# Altium PCB SmartHome_Switch.PcbDoc
Units mm, origin at the board's own origin, x right, y up, seen from the top; angles counter-clockwise.
Board outline 38.8 x 40 mm, 4 copper layers (Top Layer, GND, Power, Bottom Layer), stack 1.573 mm thick; 74 components, 54 nets, 260 pads, 131 vias.
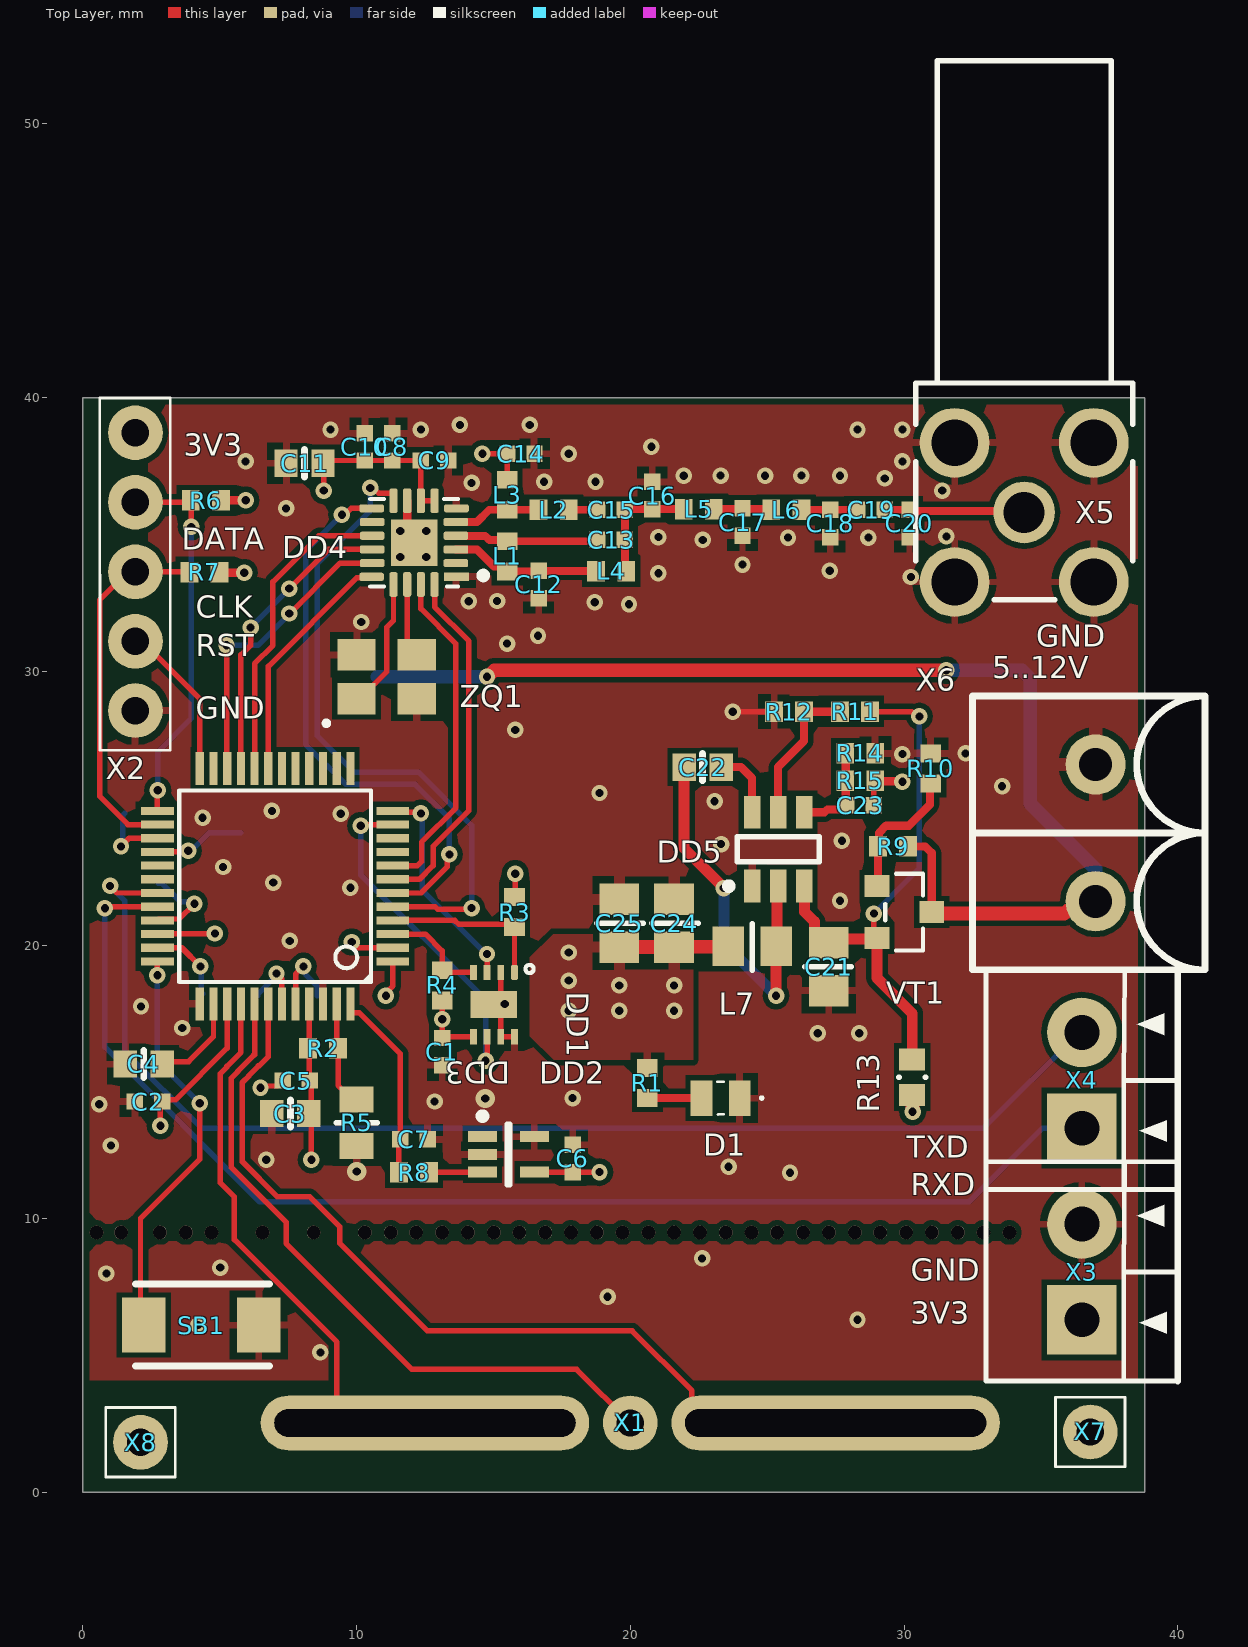
[diagram p0: Top Layer view]
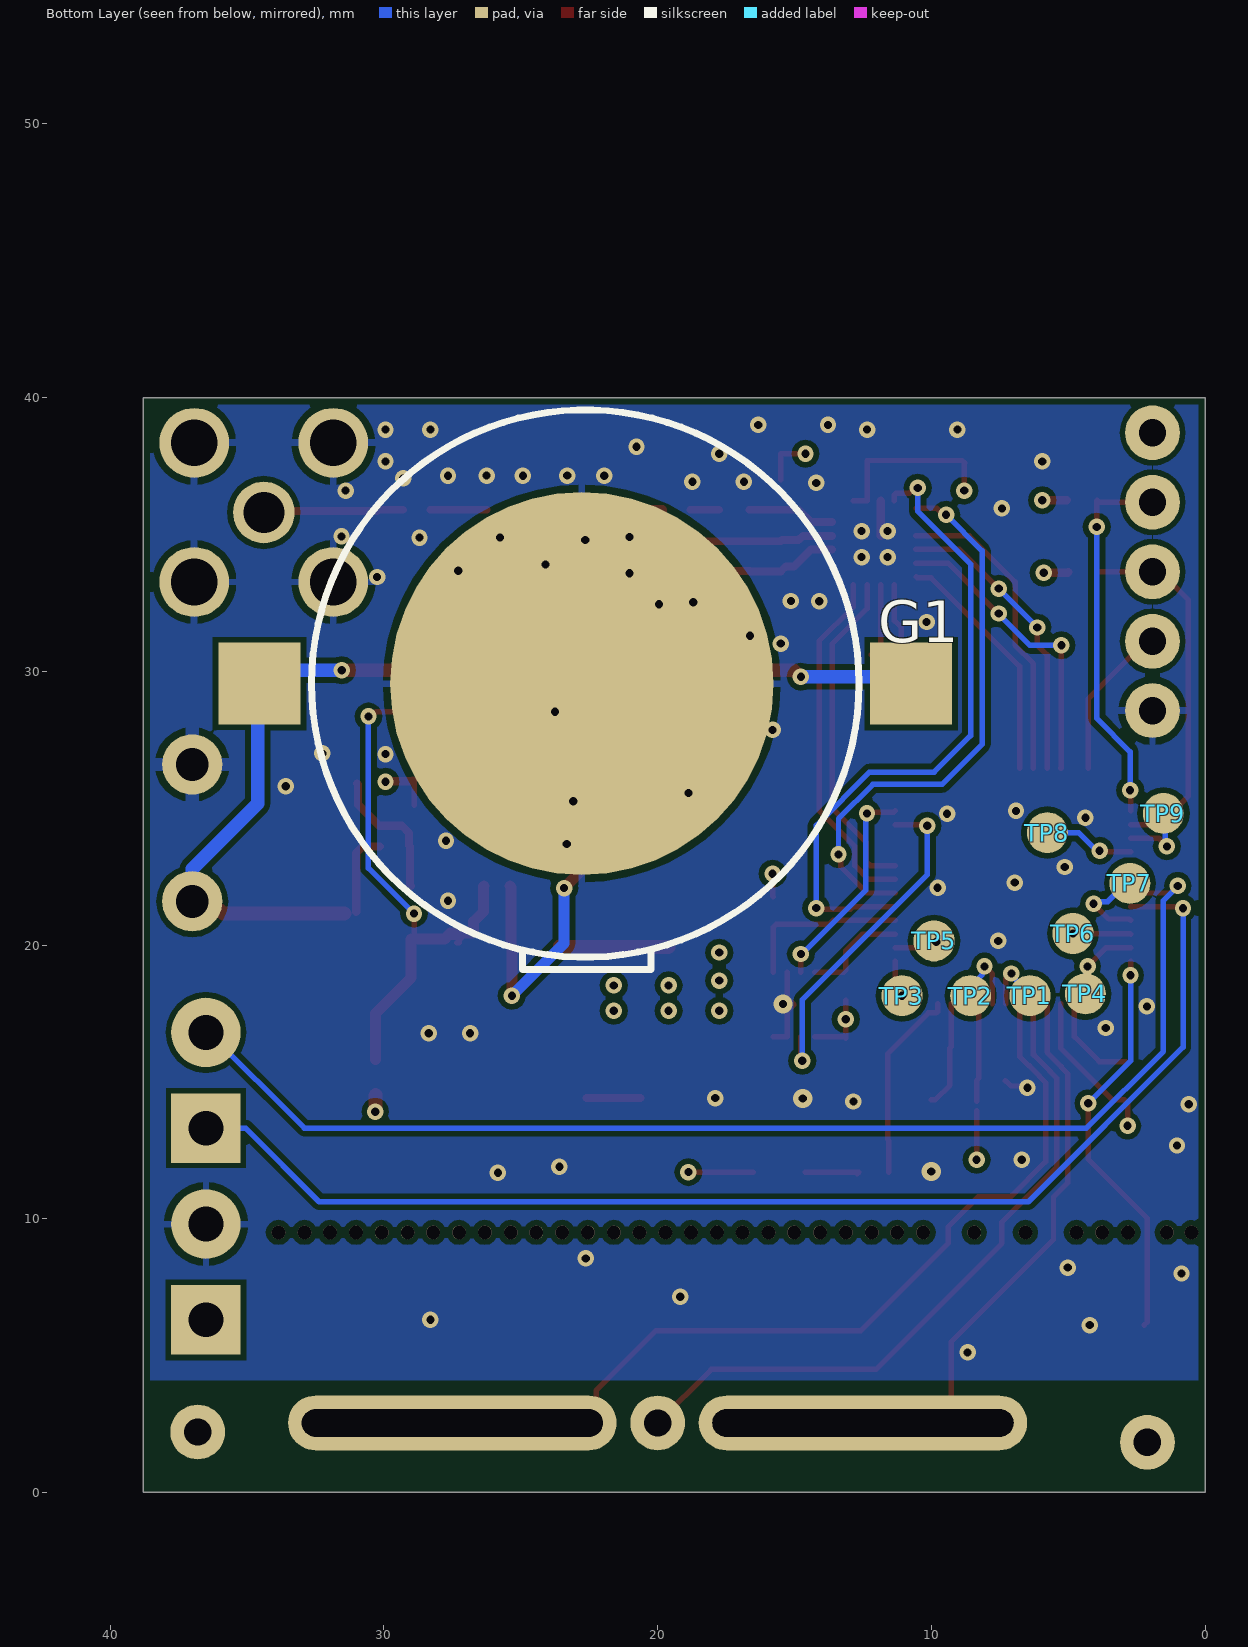
[diagram p1: Bottom Layer view, seen from below]
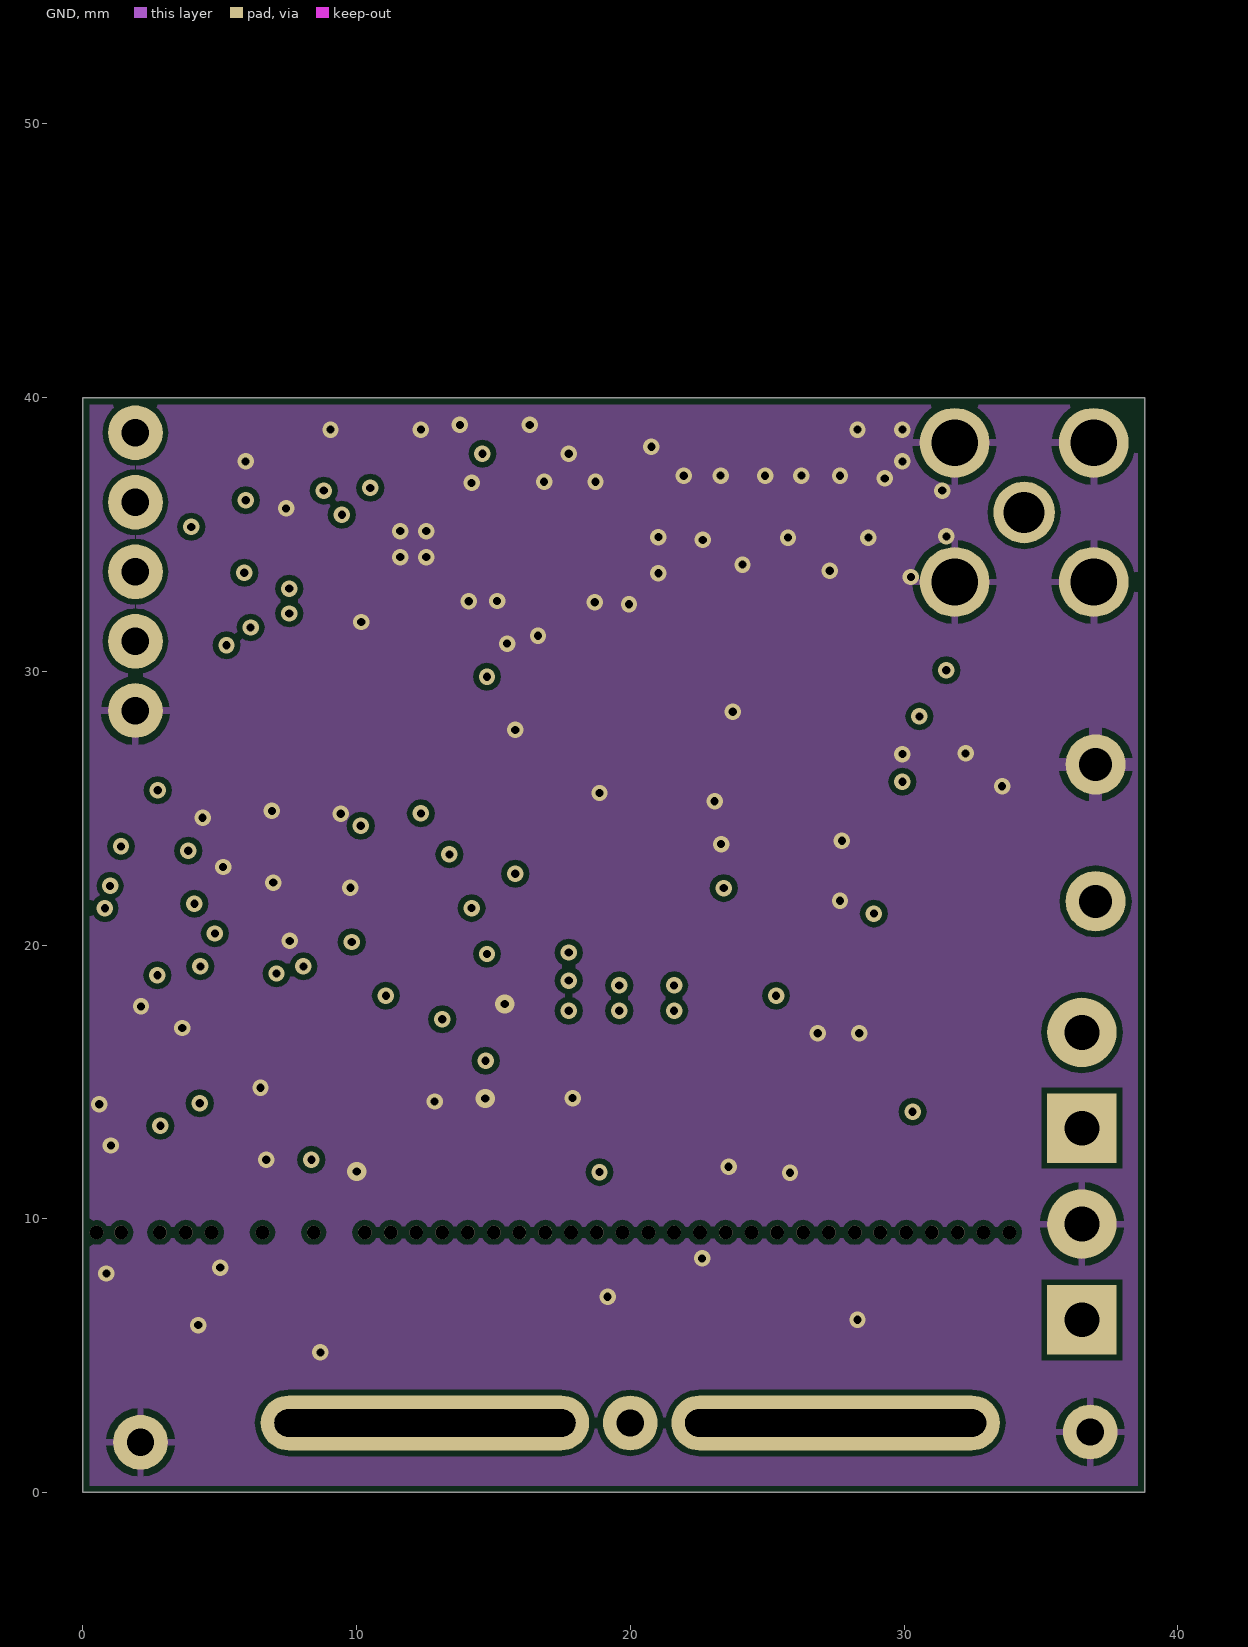
[diagram p2: GND]
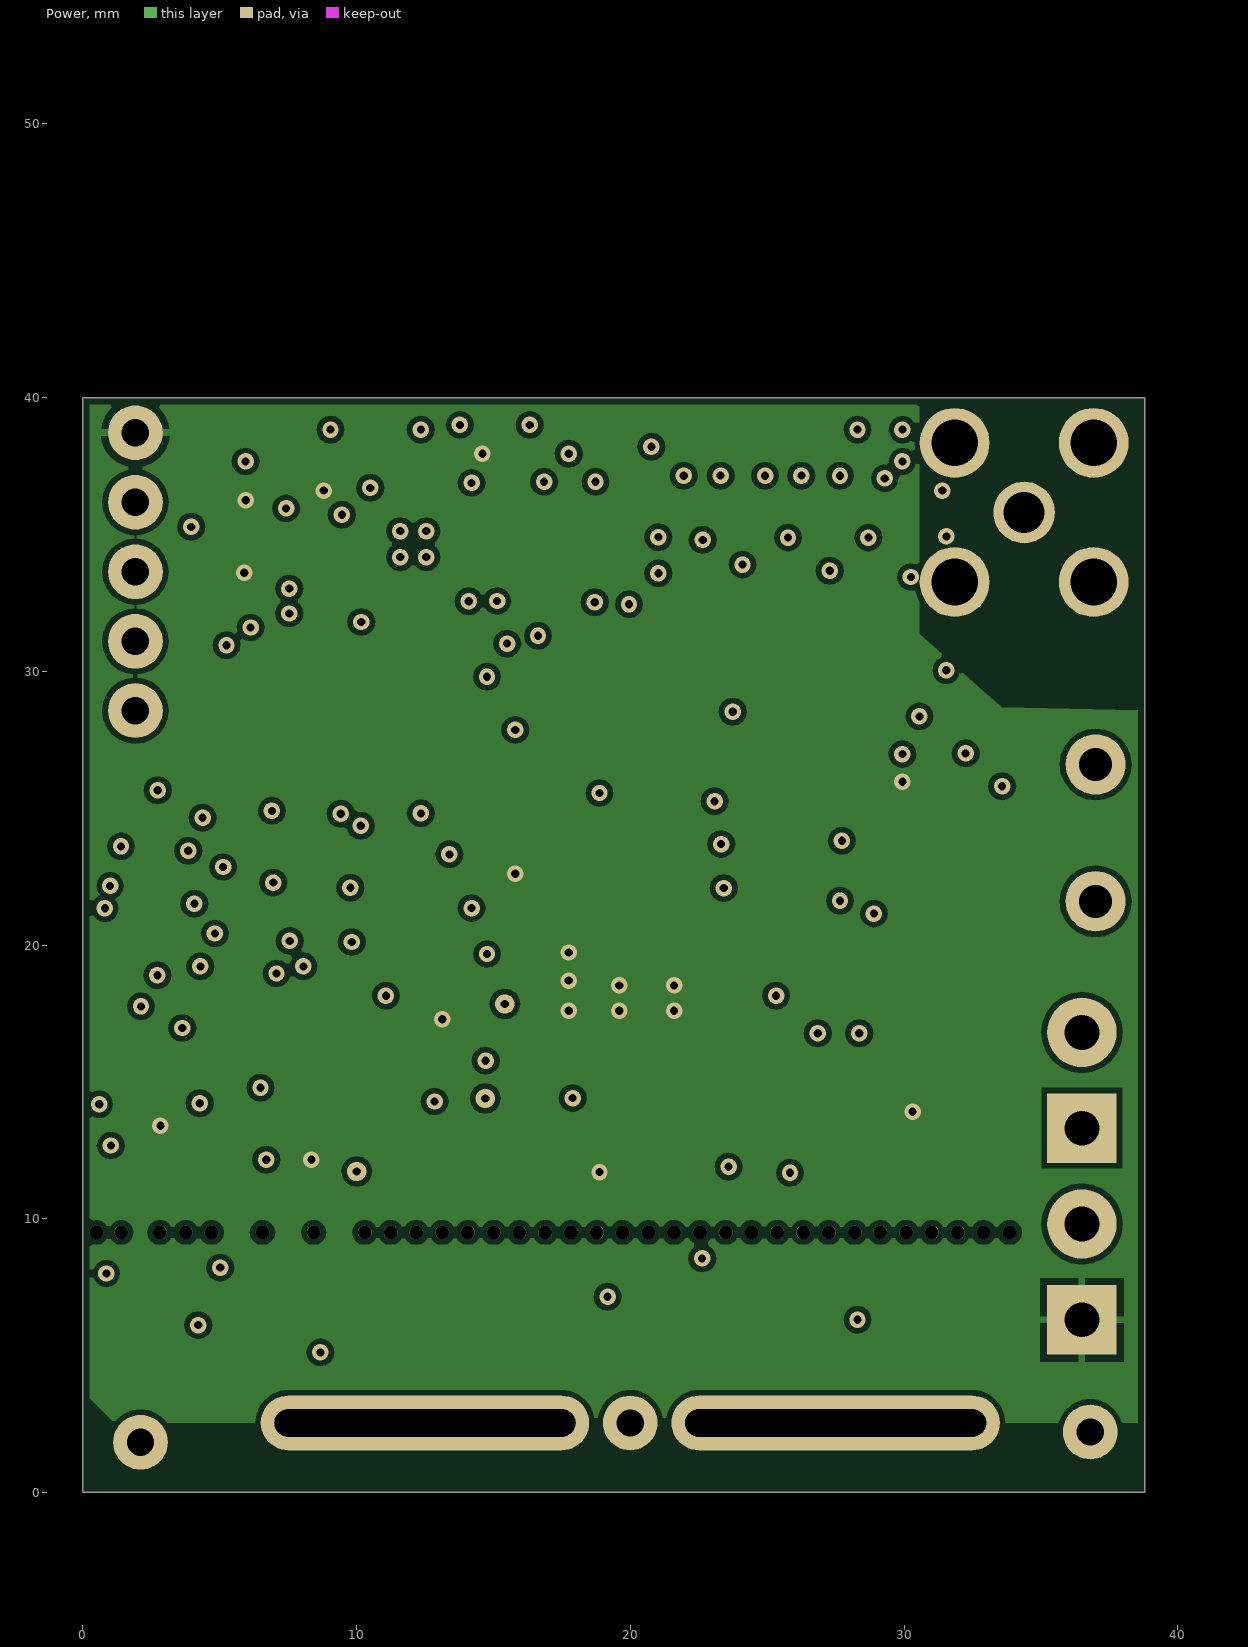
[diagram p3: Power]
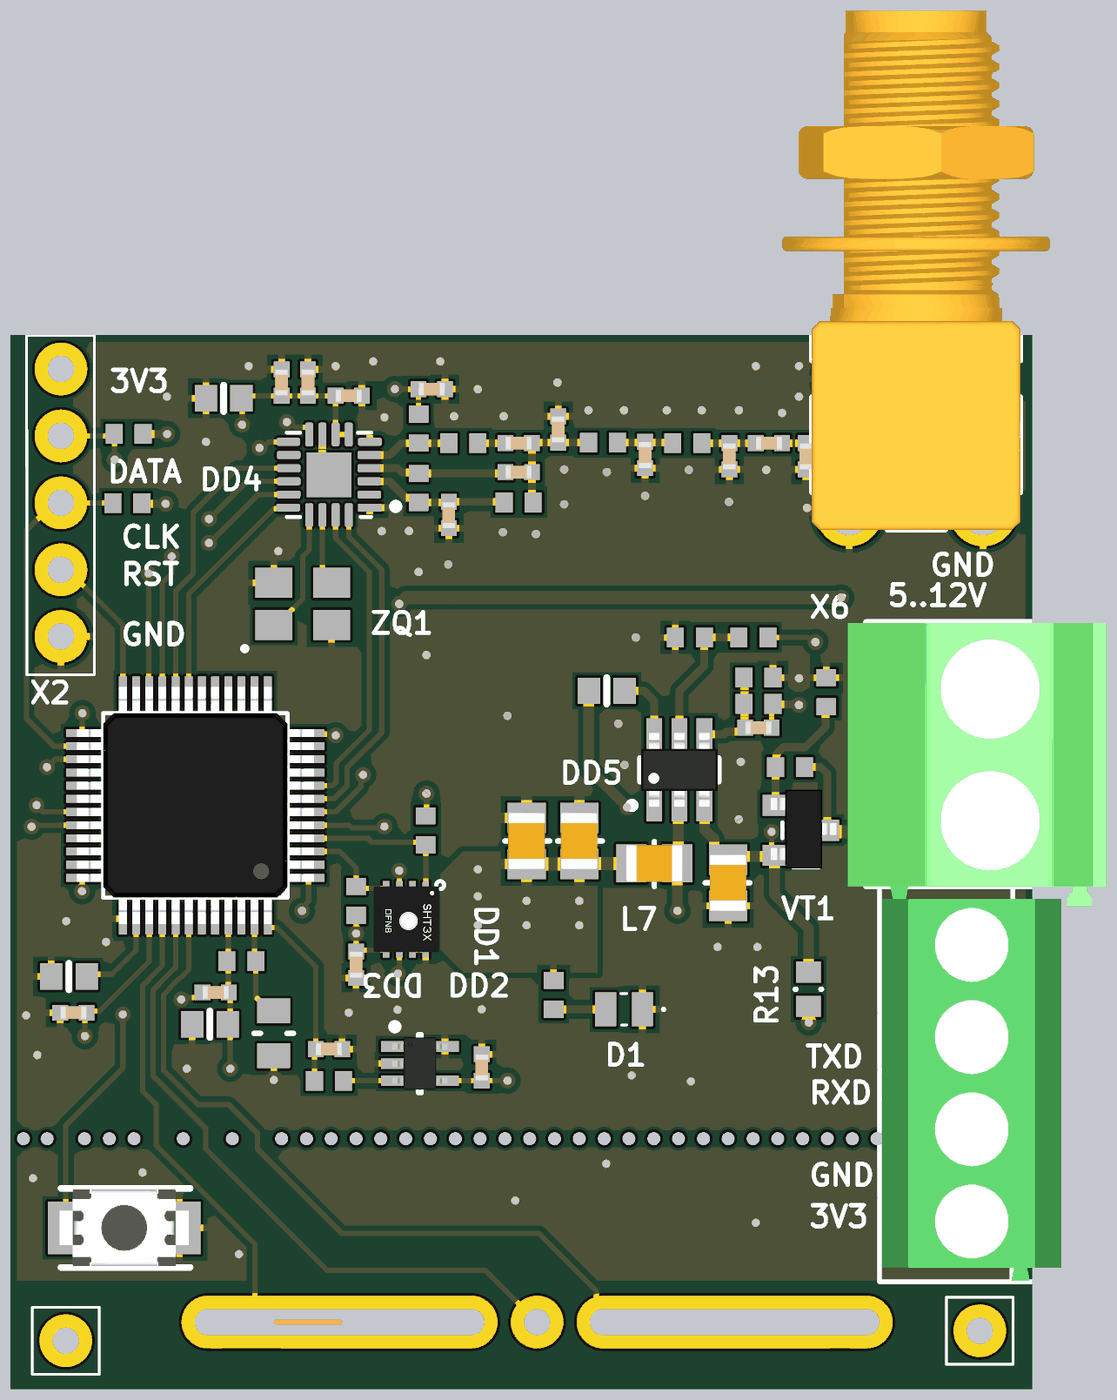
[diagram p4: 3D render of the assembled board from above, using the file's embedded part models]

## Layer stack, top to bottom
Top Solder: solder mask 0.01, Solder Resist, Dk 3.8
Top Layer: signal copper 0.036
Dielectric 2: prepreg 0.2, PP-006, Dk 4.6
GND: signal copper 0.018
Dielectric 1: dielectric 1.065, FR-4, Dk 4.6
Power: signal copper 0.018
Dielectric 3: prepreg 0.2, PP-006, Dk 4.6
Bottom Layer: signal copper 0.036
Bottom Solder: solder mask 0.01, Solder Resist, Dk 3.8

## Board outline
0,0 0,40 38.8,40 38.8,0

## Design rules (kind name [scope] priority, off if disabled: settings)
BoardOutlineClearance BoardOutlineClearance_Relay [InComponent('X6') or InComponent('X4') or InComponent('X3') or InComponent('X5') or InComponent('X2') and OnTopSilkscreen] p1: gap=0 ignorepadtopadclearanceinfootprint=FALSE
BoardOutlineClearance [All] p2: gap=0.25 ignorepadtopadclearanceinfootprint=FALSE
Clearance [All] p1: gap=0.2 ignorepadtopadclearanceinfootprint=FALSE
ComponentClearance [InComponent('X5') or InComponent('x4')] p1: gap=0 collisioncheckmode=3 verticalgap=0 showdistances=FALSE
ComponentClearance ComponentClearance_1 [All] p2: gap=0.254 collisioncheckmode=3 verticalgap=0.254 showdistances=FALSE
HoleSize [All] p1: absolutevalues=TRUE maxlimit=20 minlimit=0.025 maxpercent=80.000 minpercent=20.000
MinimumAnnularRing MinimumAnnularRing_Via [All] p1: minimumring=0.15
MinimumAnnularRing [All] p2: minimumring=0.2
MinimumSolderMaskSliver [All] p1: minsoldermaskwidth=0
PolygonConnect "Schematic Polygon Connect Style_2" [InComponent('X6')] p1: connectstyle=Relief reliefconductorwidth=0.5 reliefentries=4 polygonreliefangle="90 Angle" airgapwidth=0.254
PolygonConnect "Schematic Polygon Connect Style_1" [InComponent('C25')] p2: connectstyle=Relief reliefconductorwidth=0.4 reliefentries=4 polygonreliefangle="90 Angle" airgapwidth=0.254
PolygonConnect "Schematic Polygon Connect Style" [InComponent('C24')] p3: connectstyle=Relief reliefconductorwidth=0.4 reliefentries=4 polygonreliefangle="90 Angle" airgapwidth=0.254
PolygonConnect PolygonConnect_1 [All vs IsVia] p4: connectstyle=Direct reliefconductorwidth=0.254 reliefentries=4 polygonreliefangle="90 Angle" airgapwidth=0.254
PolygonConnect [All] p5: connectstyle=Relief reliefconductorwidth=0.254 reliefentries=4 polygonreliefangle="90 Angle" airgapwidth=0.254
RoutingVias [All] p1: holewidth=0.3 width=0.6 viastyle="Through Hole" minholewidth=0.3 minwidth=0.6 maxholewidth=5 maxwidth=5
SilkToSilkClearance [All] p1: silktosilkclearance=0.1
SilkToSolderMaskClearance [IsPad] p1: minsilkscreentomaskgap=0 clearancetoexposedcopper=TRUE
SolderMaskExpansion Via [IsVia] p1: expansion=0.102 istentingtop=TRUE
SolderMaskExpansion [All] p2: expansion=0.102 istentingtop=FALSE
Width "Schematic Width Constraint_3" [InNet('NetC17_1')] p1: maxlimit=0.291 minlimit=0.254 preferedwidth=0.29 toplayer_minwidth=0.29 toplayer_prefwidth=0.287 bottomlayer_minwidth=0.29 bottomlayer_prefwidth=0.287 impedanceprofiledriven=TRUE impedanceprofileid={CF949584-31D1-4325-900B-A550716C8CF3} impedanceprofilevalue=50.000000 minimp=50.000000 maximp=50.000000 favimp=50.000000
Width "Schematic Width Constraint_2" [InNet('NetC19_2')] p2: maxlimit=0.291 minlimit=0.254 preferedwidth=0.29 toplayer_minwidth=0.29 toplayer_prefwidth=0.287 bottomlayer_minwidth=0.29 bottomlayer_prefwidth=0.287 impedanceprofiledriven=TRUE impedanceprofileid={CF949584-31D1-4325-900B-A550716C8CF3} impedanceprofilevalue=50.000000 minimp=50.000000 maximp=50.000000 favimp=50.000000
Width "Schematic Width Constraint_1" [InNet('NetC18_1')] p3: maxlimit=0.291 minlimit=0.254 preferedwidth=0.29 toplayer_minwidth=0.29 toplayer_prefwidth=0.287 bottomlayer_minwidth=0.29 bottomlayer_prefwidth=0.287 impedanceprofiledriven=TRUE impedanceprofileid={CF949584-31D1-4325-900B-A550716C8CF3} impedanceprofilevalue=50.000000 minimp=50.000000 maximp=50.000000 favimp=50.000000
Width "Schematic Width Constraint" [InNet('NetC13_1')] p4: maxlimit=0.291 minlimit=0.254 preferedwidth=0.29 toplayer_minwidth=0.29 toplayer_prefwidth=0.287 bottomlayer_minwidth=0.29 bottomlayer_prefwidth=0.287 impedanceprofiledriven=TRUE impedanceprofileid={CF949584-31D1-4325-900B-A550716C8CF3} impedanceprofilevalue=50.000000 minimp=50.000000 maximp=50.000000 favimp=50.000000
Width [All] p5: maxlimit=2 minlimit=0.2 preferedwidth=0.2
25 further rules are at their usual default settings.

## Classes and differential pairs
net class X8_Nets: GND
net class X7_Nets: GND
component class Test_Point: X7 X8
net class TP9_Nets: NetDD2_27
net class TP8_Nets: NetDD2_28
net class TP7_Nets: NetDD2_33
net class TP6_Nets: NetDD2_34
net class TP5_Nets: NetDD2_2
net class TP4_Nets: NetDD2_35
net class TP3_Nets: NetDD2_1
component class Touch: TP1 TP2 TP3 TP4 TP5 TP6 TP7 TP8 TP9
net class ZQ1_Nets: GND NetDD4_17 NetDD4_18
net class X6_Nets: +12V_ext GND
net class X5_Nets: GND NetC19_2 NetX5_2 NetX5_3 NetX5_4 NetX5_5
net class X4_Nets: UART_RXD_5 UART_TXD_5
net class X3_Nets: 3V3 GND
net class X2_Nets: 3V3 GND NetDD2_24 NetDD2_25 NetDD2_26
net class X1_Nets: Switch_btn_1_5 Switch_btn_2_5 Switch_btn_3_5
net class VT1_Nets: +12V +12V_ext NetR9_2
net class SB1_Nets: BTN_1_5 GND
net class R15_Nets: 3V3 NetC23_2
net class R14_Nets: GND NetC23_2
net class R13_Nets: 3V3 +12V
net class R12_Nets: GND NetDD5_5
net class R11_Nets: +12V NetDD5_5
net class R10_Nets: GND NetR9_2
net class R9_Nets: +12V_ext NetR9_2
net class R8_Nets: ADC_Temp_5 NetDD3_3
net class R7_Nets: 3V3 NetDD2_26
net class R6_Nets: 3V3 NetDD2_25
net class R5_Nets: ADC_Thermistor_5 GND
net class R4_Nets: 3V3 SCL_5
net class R3_Nets: 3V3 SDA_5
net class R2_Nets: 3V3 ADC_Thermistor_5
net class R1_Nets: 3V3 NetD1_2
net class TP2_Nets: NetDD2_44
net class TP1_Nets: NetDD2_43
net class L7_Nets: 3V3 NetC22_1
net class L6_Nets: NetC17_1 NetC18_1
net class L5_Nets: NetC13_1 NetC17_1
net class L4_Nets: NetC12_1 NetC13_1
net class L3_Nets: 3V3 NetDD4_5
net class L2_Nets: NetC15_2 NetDD4_5
net class L1_Nets: NetC12_1 NetC13_2
net class G1_Nets: +12V_ext GND
net class DD5_Nets: +12V GND NetC22_1 NetC22_2 NetC23_2 NetDD5_5
net class DD4_Nets: 3V3 GND GPIO_0 GPIO_1 NetC12_1 NetC13_2 NetDD4_2 NetDD4_5 NetDD4_12 NetDD4_17 NetDD4_18 RF_CLK RF_RXTX SPI_CS SPI_MISO SPI_MOSI SPI_SCK
net class DD3_Nets: 3V3 GND NetDD3_3
net class DD2_Nets: 3V3 ADC_Temp_5 ADC_Thermistor_5 ALERT_SHT_5 BTN_1_5 GND GPIO_0 GPIO_1 NetC4_2 NetDD2_1 NetDD2_2 NetDD2_9 NetDD2_10 NetDD2_13 NetDD2_14 NetDD2_15 NetDD2_16 NetDD2_17 NetDD2_18 NetDD2_23 NetDD2_24 NetDD2_25 NetDD2_26 NetDD2_27 NetDD2_28 NetDD2_29 NetDD2_30 NetDD2_33 NetDD2_34 NetDD2_35 NetDD2_43 NetDD2_44 nRES_SHT_5 RF_CLK RF_RXTX SCL_5 SDA_5 SPI_CS SPI_MISO SPI_MOSI SPI_SCK Switch_btn_1_5 Switch_btn_2_5 Switch_btn_3_5 UART_RXD_5 UART_TXD_5
net class DD1_Nets: 3V3 ALERT_SHT_5 GND nRES_SHT_5 SCL_5 SDA_5
net class D1_Nets: GND NetD1_2
net class C25_Nets: 3V3 GND
net class C24_Nets: 3V3 GND
net class C23_Nets: 3V3 NetC23_2
net class C22_Nets: NetC22_1 NetC22_2
net class C21_Nets: +12V GND
net class C20_Nets: GND NetC19_2
net class C19_Nets: NetC18_1 NetC19_2
net class C18_Nets: GND NetC18_1
net class C17_Nets: GND NetC17_1
net class C16_Nets: GND NetC13_1
net class C15_Nets: NetC13_1 NetC15_2
net class C14_Nets: 3V3 GND
net class C13_Nets: NetC13_1 NetC13_2
net class C12_Nets: GND NetC12_1
net class C11_Nets: 3V3 GND
net class C10_Nets: 3V3 GND
net class C9_Nets: 3V3 GND
net class C8_Nets: 3V3 GND
net class C7_Nets: ADC_Temp_5 GND
net class C6_Nets: 3V3 GND
net class C5_Nets: 3V3 GND
net class C4_Nets: GND NetC4_2
net class C3_Nets: 3V3 GND
net class C2_Nets: 3V3 GND
net class C1_Nets: 3V3 GND
component class XTAL: ZQ1
component class Thermistor: R5
component class "Temperature sensor": DD3
component class SMA: X5
component class Sensor: DD1
component class RF: DD4
component class Resistor: R1 R2 R3 R4 R6 R7 R8 R9 R10 R11 R12 R13 R14 R15
component class MosFET: VT1
component class MCU: DD2
component class LED: D1
component class Inductor: L1 L2 L3 L4 L5 L6 L7
component class Connector: X1 X2 X3 X4 X6
component class Capacitor: C1 C2 C3 C4 C5 C6 C7 C8 C9 C10 C11 C12 C13 C14 C15 C16 C17 C18 C19 C20 C21 C22 C23 C24 C25
component class Button: SB1
component class Buck: DD5
component class Battery: G1
component class RS1: C1 C2 C3 C4 C5 C6 C7 D1 DD1 DD2 DD3 R1 R2 R3 R4 R5 R6 R7 R8 SB1 TP1 TP2 TP3 TP4 TP5 TP6 TP7 TP8 TP9 X1 X2 X3 X4 X7 X8
component class RF1: C8 C9 C10 C11 C12 C13 C14 C15 C16 C17 C18 C19 C20 DD4 L1 L2 L3 L4 L5 L6 X5 ZQ1
component class PWR1: C21 C22 C23 C24 C25 DD5 G1 L7 R9 R10 R11 R12 R13 R14 R15 VT1 X6

## Components (designator, comment, footprint, x,y, rotation, side; value= is the part's Value field where it differs from the comment)
C1 "100nF" CAP0402 13.13,16.102 r90 top
C2 "100nF" CAP0402 2.399,14.282 r0 top
C3 "10uF" CAPC0603N 7.58,13.844 r180 top
C4 "1uF" CAPC0603N 2.226,15.654 r0 top
C5 "100nF" CAP0402 7.797,15.05 r0 top
C6 "100nF" CAP0402 17.9,12.205 r270 top
C7 "100nF" CAP0402 12.1,12.9 r180 top
C8 "100pF" CAP0402 11.3,38.2 r270 top
C9 "33pF" CAP0402 12.85,37.7 r180 top
C10 "100nF" CAP0402 10.3,38.2 r270 top
C11 "10uF" CAPC0603N 8.1,37.6 r180 top
C12 "5.1pF" CAP0402 16.65,33.17 r270 top
C13 "2.7pF" CAP0402 19.3,34.8 r180 top
C14 "270pF" CAP0402 16,37.95 r0 top
C15 "6.2pF" CAP0402 19.3,35.9 r180 top
C16 "10pF" CAP0402 20.8,36.42 r90 top
C17 "15pF" CAP0402 24.1,35.45 r270 top
C18 "8.2pF" CAP0402 27.3,35.4 r270 top
C19 "270pF" CAP0402 28.8,35.9 r0 top
C20 "4.3pF" CAP0402 30.2,35.4 r270 top
C21 "CAPC0805" CAPC0805N 27.251,19.212 r90 top value=22uF
C22 "1uF" CAPC0603N 22.644,26.5 r0 top
C23 "33pF" CAP0402 28.4,25.1 r180 top
C24 "CAPC0805" CAPC0805N 21.6,20.8 r270 top value=22uF
C25 "CAPC0805" CAPC0805N 19.6,20.8 r270 top value=22uF
D1 "Color" LED603 23.3,14.409 r180 top
DD1 "SHT30-DIS-B2.5KS" DFN8 15.021,17.825 r270 top
DD2 "Value" LQFP48 7.025,22.15 r180 top locked
DD3 "Value" SC70-5 15.55,12.35 r0 top
DD4 "Si4455-С2A-GM" SLAB-QFN-20 12.1,34.7 r180 top
DD5 "Value" SOT23-6 25.4,23.5 r90 top
G1 "C70373" BAT-SMD_CR2032-3V 22.644,29.551 r90 bottom locked
L1 "56nH" RESC0402(1005)_M 15.5,34.2 r270 top
L2 "56nH" RESC0402(1005)_M 17.2,35.9 r0 top
L3 "220nH" RESC0402(1005)_M 15.5,36.45 r90 top
L4 "56nH" RESC0402(1005)_M 19.3,33.65 r0 top
L5 "18nH" RESC0402(1005)_M 22.5,35.92 r0 top
L6 "18nH" RESC0402(1005)_M 25.7,35.9 r0 top
L7 "22uH" CAPC0805N 24.45,19.95 r180 top
R1 "1k" RESC0402(1005)_M 20.627,14.959 r270 top
R2 "10k" RESC0402(1005)_M 8.775,16.237 r0 top
R3 "10k" RESC0402(1005)_M 15.771,21.204 r90 top
R4 "10k" RESC0402(1005)_M 13.13,18.525 r270 top
R5 "10kohm" RESC0805L 10,13.5 r270 top
R6 "100k" RESC0402(1005)_M 4.495,36.247 r0 top
R7 "100k" RESC0402(1005)_M 4.445,33.623 r0 top
R8 "470" RESC0402(1005)_M 12.1,11.696 r180 top
R9 "100k" RESC0402(1005)_M 29.6,23.604 r180 top
R10 "100k" RESC0402(1005)_M 30.979,26.45 r90 top
R11 "10k" RESC0402(1005)_M 28.21,28.525 r180 top
R12 "6.8k" RESC0402(1005)_M 25.8,28.525 r180 top
R13 "DNI" RESC0603N 30.3,15.172 r270 top
R14 "33k" RESC0402(1005)_M 28.4,27 r0 top
R15 "100k" RESC0402(1005)_M 28.4,26 r0 top
SB1 "DTSM-3" SW_SKRKAEE020 6.425,6.116 r180 top
TP1 "TP-SINGLE-ROUND" TP-ROUND-TOP-1.5 6.399,18.15 r180 bottom
TP2 "TP-SINGLE-ROUND" TP-ROUND-TOP-1.5 8.564,18.15 r90 bottom
TP3 "TP-SINGLE-ROUND" TP-ROUND-TOP-1.5 11.074,18.15 r90 bottom
TP4 "TP-SINGLE-ROUND" TP-ROUND-TOP-1.5 4.375,18.217 r90 bottom
TP5 "TP-SINGLE-ROUND" TP-ROUND-TOP-1.5 9.903,20.15 r90 bottom
TP6 "TP-SINGLE-ROUND" TP-ROUND-TOP-1.5 4.826,20.422 r90 bottom
TP7 "TP-SINGLE-ROUND" TP-ROUND-TOP-1.5 2.749,22.254 r90 bottom
TP8 "TP-SINGLE-ROUND" TP-ROUND-TOP-1.5 5.766,24.105 r90 bottom
TP9 "TP-SINGLE-ROUND" TP-ROUND-TOP-1.5 1.525,24.808 r90 bottom
VT1 "AO3401A" SOT-23 30.013,21.204 r0 top
X1 "PLS-3" SmartHome_for_switch 20,2.54 r0 top
X2 "PLS5" PLS5 1.922,38.714 r270 top
X3 "DG350-3.5-02P-14-00A" Conn_3,5mm_2pin 36.5,6.307 r90 top
X4 "DG350-3.5-02P-14-00A" Conn_3,5mm_2pin 36.5,13.307 r90 top
X5 "Value" 60311042114502 34.388,35.801 r180 top
X6 "DG500-5.0-02P-14" DG500-5.0-02P-14 37,24.095 r90 top
X7 "PLS1" PLS1 36.805,2.21 r0 top
X8 "PLS1" PLS1 2.108,1.833 r0 top
ZQ1 "X322525MOB4SI" TSX-3225_V 11.1,29.8 r0 top

## Footprints (in the part's own frame and the unit in brackets; to place one, negate y for a bottom-side part, rotate by r counter-clockwise, add the part's x,y. Pads: shape width x height; smd on the part's side, far side on the other; paste and mask are expansions set on the pad)
60311042114502 [mm] "SMA PCB THT Jack Right Angle  Rear Mount Bulkhead"
  round 2.25 hole 1.5: 1(0,0)
  round 2.55 hole 1.7: 2(-2.54,2.54) 3(2.54,2.54) 4(2.54,-2.54) 5(-2.54,-2.54)
  silkscreen extent -3.96,-16.5 3.96,3.19, body extent -5.1,-16.5 5.1,3.19, height 12.2
BAT-SMD_CR2032-3V [mm]
  rect 3x3 smd: 1(0,-11.9) 1(0,11.9)
  round 14 smd: 2(0,0.127)
  silkscreen extent -10.45,-10 10,10, body extent -10.23,-12.25 9.57,11.75, height 3.91
CAP0402 [mm]
  rect 0.6x0.6 smd: 1(-0.5,0) 2(0.5,0)
  body extent -0.5,-0.25 0.5,0.25, height 0.49
CAPC0603N [mm] "Chip Capacitor, 2-Leads, Body 1,60x0,85mm, IPC Medium Density"
  rect 0.85x1 smd: 1(-0.675,0) 2(0.675,0)
  silkscreen extent 0,-0.5 0,0.5, body extent -0.85,-0.48 0.85,0.47, height 0.8
CAPC0805N [mm] "Chip Capacitor, 2-Leads, Body 2,00x1,25mm, IPC Medium Density"
  rect 1.15x1.45 smd: 1(-0.875,0) 2(0.875,0)
  silkscreen extent 0,-0.82 0,0.87, body extent -1.07,-0.7 1.07,0.7, height 0.9
Conn_3,5mm_2pin [mm]
  rect 2.54x2.54 hole 1.27: 1(0,0)
  round 2.54 hole 1.27: 2(3.5,0)
  silkscreen extent -2.24,-3.5 5.78,3.5, body extent -2.2,-3.4 5.8,3.4, height 8.4
DFN8 [mm]
  rrect50% 0.55x0.25 smd: 1(-1.175,0.75)
  rect 0.55x0.25 smd: 2(-1.175,0.25) 3(-1.175,-0.25) 4(-1.175,-0.75) 5(1.175,-0.75) 6(1.175,-0.25) 7(1.175,0.25) 8(1.175,0.75)
  rect 1x1.7 smd: 9(0,0)
  silkscreen extent -1.45,1.15 -1.15,1.45, body extent -1.25,-1.23 1.25,1.27, height 0.9
DG500-5.0-02P-14 [mm]
  round 2.2 hole 1.2: 1(-2.5,0) 2(2.5,0)
  silkscreen extent -5,-4 5,4.5, body extent -5.77,-4.6 4.97,5.2, height 13.8
LED603 [mm]
  rect 0.8x1.3 smd: 1(-0.7,0) 2(0.7,0)
  silkscreen extent -1.55,-0.6 0.12,0.6
LQFP48 [mm]
  rect 1.2x0.3 smd: 1(-4.3,2.75) 2(-4.3,2.25) 3(-4.3,1.75) 4(-4.3,1.25) 5(-4.3,0.75) 6(-4.3,0.25) 7(-4.3,-0.25) 8(-4.3,-0.75) 9(-4.3,-1.25) 10(-4.3,-1.75) 11(-4.3,-2.25) 12(-4.3,-2.75) 25(4.3,-2.75) 26(4.3,-2.25) 27(4.3,-1.75) 28(4.3,-1.25) 29(4.3,-0.75) 30(4.3,-0.25) 31(4.3,0.25) 32(4.3,0.75) 33(4.3,1.25) 34(4.3,1.75) 35(4.3,2.25) 36(4.3,2.75)
  rect 0.3x1.2 smd: 13(-2.75,-4.3) 14(-2.25,-4.3) 15(-1.75,-4.3) 16(-1.25,-4.3) 17(-0.75,-4.3) 18(-0.25,-4.3) 19(0.25,-4.3) 20(0.75,-4.3) 21(1.25,-4.3) 22(1.75,-4.3) 23(2.25,-4.3) 24(2.75,-4.3) 37(2.75,4.3) 38(2.25,4.3) 39(1.75,4.3) 40(1.25,4.3) 41(0.75,4.3) 42(0.25,4.3) 43(-0.25,4.3) 44(-0.75,4.3) 45(-1.25,4.3) 46(-1.75,4.3) 47(-2.25,4.3) 48(-2.75,4.3)
  silkscreen extent -3.5,-3.5 3.5,3.5, body extent -4.5,-4.5 4.5,4.5, height 1.5
PLS1 [mm]
  round 2 hole 1: 1(0,0)
  silkscreen extent -1.27,-1.27 1.27,1.27
PLS5 [mm]
  round 2 hole 1: 1(0,0) 2(2.54,0) 3(5.08,0) 4(7.62,0) 5(10.15,0)
  silkscreen extent -1.27,-1.3 11.6,1.27
RESC0402(1005)_M [mm] "Chip Resistor, Body 1.0x0.5mm, IPC Low Density"
  rect 0.65x0.75 smd: 1(-0.55,0) 2(0.55,0)
  body extent -0.52,-0.28 0.53,0.28, height 0.4
RESC0603N [mm] "Chip Resistor, 2-Leads, Body 1,60x0,85mm, IPC Medium Density"
  rect 0.8x0.95 smd: 1(-0.65,0) 2(0.65,0)
  silkscreen extent 0,-0.5 0,0.5, body extent -0.85,-0.48 0.85,0.48, height 0.5
RESC0805L [mm] "Chip Resistor, 2-Leads, Body 2,00x1,25mm, IPC High Density"
  rect 0.95x1.25 smd: 1(-0.85,0) 2(0.85,0)
  silkscreen extent 0,-0.75 0,0.75, body extent -1.1,-0.67 1.1,0.67, height 0.7
SC70-5 [mm] "SOT363, 6-Leads, Body 2x1.3mm, Pitch 0.65mm, Lead Span 2.1mm, IPC Low Density"
  rect 1.05x0.4 smd: 1(-0.95,0.65) 2(-0.95,0) 3(-0.95,-0.65) 4(0.95,-0.65) 5(0.95,0.65)
  silkscreen extent -1.07,-1.1 0.05,1.52, body extent -1.05,-1 1.05,1, height 0.95
SLAB-QFN-20 [mm] "QFN, 20-Leads, Body 3x3mm, Pitch 0.5mm, Thermal Pad 1.7x1.7mm"
  rect 0.9x0.3 smd: 1(-1.55,1.25)
  rrect50% 0.9x0.3 smd: 2(-1.53,0.75) 3(-1.53,0.25) 4(-1.53,-0.25) 5(-1.53,-0.75) 6(-1.55,-1.25) 11(1.55,-1.25) 12(1.53,-0.75) 13(1.53,-0.25) 14(1.53,0.25) 15(1.53,0.75) 16(1.55,1.25)
  rrect50% 0.3x0.9 smd: 7(-0.75,-1.53) 8(-0.25,-1.53) 9(0.25,-1.53) 10(0.75,-1.53) 17(0.75,1.53) 18(0.25,1.53) 19(-0.25,1.53) 20(-0.75,1.53)
  rect 1.7x1.7 smd: 21(0,0)
  silkscreen extent -2.66,-1.6 1.6,1.6, body extent -1.5,-1.5 1.5,1.5, height 0.9
SmartHome_for_switch [mm]
  oval 12x2 hole 1 slot 11 at 0 deg: 1(-7.5,0) 3(7.5,0)
  round 2 hole 1: 2(0,0)
SOT23-6 [mm] "SOT23, 6-Leads, Body 2,90x2,80mm, Pitch 0,95mm, IPC Medium Density"
  rect 1.2x0.6 smd: 1(-1.35,0.95) 2(-1.35,0) 3(-1.35,-0.95) 4(1.35,-0.95) 5(1.35,0) 6(1.35,0.95)
  silkscreen extent -1.47,-1.5 0.45,1.92, body extent -1.4,-1.45 1.4,1.45, height 1.45
SOT-23 [mm]
  rect 0.9x0.8 smd: 1(-1,0.95) 2(-1,-0.95) 3(1,0)
  silkscreen extent -0.7,-1.4 0.68,1.4, body extent -1.15,-1.45 1.35,1.55, height 1.05
SW_SKRKAEE020 [mm]
  rect 1.6x2 smd: 1(0,0) 2(4.2,0)
  silkscreen extent -0.4,-1.5 4.5,1.5, body extent -0.35,-1.45 4.55,1.45, height 2
TP-ROUND-TOP-1.5 [mm]
  round 1.5 smd: 1(0,0)
TSX-3225_V [mm] "SMD, 4-Leads, Body 3.2x2.5mm"
  rect 1.4x1.15 smd: 1(-1.1,-0.8) 2(1.1,-0.8) 3(1.1,0.8) 4(-1.1,0.8)
  silkscreen extent -2.25,-1.75 -2.15,-1.65, body extent -1.6,-1.25 1.6,1.25, height 0.6

## Part data
C1 C2 C5 C6 C7 C8 C9 C10 C12 C13 C14 C15 C16 C17 C18 C19 C20 C23: library part CAP0402, Package=C_0402, CFootprint=CAP0402, ClassName=Capacitor, ComponentLink1Description=Datasheet, MntType=SMD, MSL="MSL 1", Part Number=CAP0402, PartType="CHIP CERAMIC CAPACITOR", Pins=2, RoHS=Comply
  C1 C2 C5 C6 C7 C10: BOMDescription="SMD CHIP CERAMIC CAPACITOR C_0402 100nF"
  C8: BOMDescription="SMD CHIP CERAMIC CAPACITOR C_0402 100pF"
  C9 C23: BOMDescription="SMD CHIP CERAMIC CAPACITOR C_0402 33pF"
  C12: BOMDescription="SMD CHIP CERAMIC CAPACITOR C_0402 5.1pF"
  C13: BOMDescription="SMD CHIP CERAMIC CAPACITOR C_0402 2.7pF"
  C14 C19: BOMDescription="SMD CHIP CERAMIC CAPACITOR C_0402 270pF"
  C15: BOMDescription="SMD CHIP CERAMIC CAPACITOR C_0402 6.2pF"
  C16: BOMDescription="SMD CHIP CERAMIC CAPACITOR C_0402 10pF"
  C17: BOMDescription="SMD CHIP CERAMIC CAPACITOR C_0402 15pF"
  C18: BOMDescription="SMD CHIP CERAMIC CAPACITOR C_0402 8.2pF"
  C20: BOMDescription="SMD CHIP CERAMIC CAPACITOR C_0402 4.3pF"
C3 C4 C11 C22: library part CAPC, Package=CAPC0603N, CFootprint=CAPC0603N, ClassName=Capacitor, ComponentLink1Description=Datasheet, MntType=SMD, MSL="MSL 1", Part Number=CAPC, PartType="CHIP CERAMIC CAPACITOR", Pins=2, RoHS=Comply
  C3 C11: BOMDescription="SMD CHIP CERAMIC CAPACITOR CAPC0603N 10uF"
  C4 C22: BOMDescription="SMD CHIP CERAMIC CAPACITOR CAPC0603N 1uF"
C21 C24 C25: Package=CAPC0805N, Voltage=25V, BOMDescription="SMD CHIP CERAMIC CAPACITOR CAPC0805N 22uF  25V", CFootprint=CAPC0805N, ClassName=Capacitor, ComponentLink1Description=Datasheet, MntType=SMD, MSL="MSL 1", Part Number=CAPC0805, PartType="CHIP CERAMIC CAPACITOR", Pins=2, RoHS=Comply
  C24 C25: Rule="Polygon Connect Style [Style - Relief Connect    Width = 0.4mm    Angle = 90    # Entries = 4    Air Gap = 0.254mm    ]"
D1: library part LEDC, Package=LED603, BOMDescription="SMD CHIP LED LED603 Color", CFootprint=LED603, ClassName=LED, ComponentLink1Description=Datasheet, MntType=SMD, MSL="MSL 5", Part Number=LEDC, PartType="CHIP LED", Pins=2, RoHS=Comply
DD1: Manufacturer=SENSIRION, Package=DFN8, BOMDescription=SHT30-DIS-B2.5KS, CFootprint=DFN8, ClassName=Sensor, ComponentLink1Description=Datasheet, ComponentLink1URL=https://datasheet.lcsc.com/lcsc/2012111104_Sensirion-SHT30-DIS-B2-5KS_C77361.pdf, MntType=SMD, MPN=SHT30-DIS-B2.5KS, MSL="MSL 1", Part Number=SHT30-DIS-B2.5KS, PartType="Sensor temp and humidity", Pins=9, RoHS=Comply
DD2: library part M031LD2AE, Manufacturer=Nuvoton, Package=LQFP48, BOMDescription=M031LD2AE, CFootprint=LQFP48, ClassName=MCU, ComponentLink1Description=Datasheet, ComponentLink1URL=https://www.nuvoton.com/products/microcontrollers/arm-cortex-m0-mcus/m031-series/m031ld2ae/?group=Document&tab=2, MntType=SMD, MPN=M031LD2AE, MSL="MSL 1", Part Number=M031LD2AE, PartType=MCU, Pins=48, RoHS=Comply
DD3: library part LMT88DCKR, Manufacturer=TI, Package=SC70, BOMDescription=LMT88DCKR, CFootprint=SC70-5, ClassName="Temperature sensor", ComponentLink1Description=Datasheet, ComponentLink1URL=https://www.ti.com/lit/ds/symlink/lmt88.pdf?ts=1635229688804&ref_url=https%253A%252F%252Fwww.ti.com%252Fproduct%252FLMT88%253Fqgpn%253Dlmt88, MntType=SMD, MPN=LMT88DCKR, MSL="MSL 1", Part Number=LMT88DCKR, PartType="Temperature sensor", Pins=5, RoHS=Comply
DD4: Manufacturer=SiLabs, Package=QFN20, BOMDescription=Si4455-С2A-GM, CFootprint=SLAB-QFN-20, ClassName=RF, ComponentLink1Description=Datasheet, ComponentLink1URL=https://www.silabs.com/documents/public/data-sheets/Si4455.pdf, MntType=SMD, MPN=Si4455-С2A-GM, MSL="MSL 1", Part Number=Si4455-С2A-GM, PartType=RF, Pins=21, RoHS=Comply
DD5: library part MT1470, Manufacturer="XI'AN Aerosemi Tech", Package=SOT23-6, BOMDescription=MT1470, CFootprint=SOT23-6, ClassName=Buck, ComponentLink1Description=Datasheet, ComponentLink1URL=https://datasheet.lcsc.com/lcsc/2109171430_XI-AN-Aerosemi-Tech-MT1470_C181781.pdf, MntType=SMD, MPN=MT1470, MSL="MSL 1", Part Number=MT1470, PartType="Buck converter", Pins=6, RoHS=Comply
L1 L2 L3 L4 L5 L6: library part Inductor_SMD, Manufacturer=TDK, MPN=MLF2012, Package=RESC0402(1005)_M, CFootprint=RESC0402(1005)_M, ClassName=Inductor, ComponentLink1Description=Datasheet, MntType=SMD, MSL="MSL 1", Part Number=Inductor_SMD, PartType=INDUCTOR, Pins=2, RoHS=Comply
  L1 L2 L4: BOMDescription="SMD INDUCTOR RESC0402(1005)_M 56nH    MLF2012"
  L3: BOMDescription="SMD INDUCTOR RESC0402(1005)_M 220nH    MLF2012"
  L5 L6: BOMDescription="SMD INDUCTOR RESC0402(1005)_M 18nH    MLF2012"
L7: library part MGFL2012F220MT-LF, Manufacturer=microgate, Package=CAPC0805N, BOMDescription=MGFL2012F220MT-LF, CFootprint=CAPC0805N, ClassName=Inductor, ComponentLink1Description=Datasheet, ComponentLink1URL=https://datasheet.lcsc.com/lcsc/2002201432_microgate-MGFL2012F220MT-LF_C486334.pdf, MntType=SMD, MPN=MGFL2012F220MT-LF, MSL="MSL 1", Part Number=MGFL2012F220MT-LF, PartType=INDUCTOR, Pins=2, RoHS=Comply
R1 R2 R3 R4 R6 R7 R8 R9 R10 R11 R12 R14 R15: library part RES0402, Package=RESC0402(1005)_M, CFootprint=RESC0402(1005)_M, ClassName=Resistor, ComponentLink1Description=Datasheet, MntType=SMD, MSL="MSL 1", Part Number=RES0402, PartType="CHIP RESISTOR", Pins=2, RoHS=Comply
  R1: BOMDescription="SMD CHIP RESISTOR RESC0402(1005)_M 1k"
  R2 R3 R4 R11: BOMDescription="SMD CHIP RESISTOR RESC0402(1005)_M 10k"
  R6 R7 R9 R10 R15: BOMDescription="SMD CHIP RESISTOR RESC0402(1005)_M 100k"
  R8: BOMDescription="SMD CHIP RESISTOR RESC0402(1005)_M 470"
  R12: BOMDescription="SMD CHIP RESISTOR RESC0402(1005)_M 6.8k"
  R14: BOMDescription="SMD CHIP RESISTOR RESC0402(1005)_M 33k"
R5: library part SDNT2012X103F3950FTF, Manufacturer=Sunlord, Package=RESC0805L, BOMDescription=SDNT2012X103F3950FTF, CFootprint=RESC0805L, ClassName=Thermistor, ComponentLink1Description=Datasheet, ComponentLink1URL=https://datasheet.lcsc.com/lcsc/1811111111_Sunlord-SDNT2012X103F3950FTF_C95968.pdf, MntType=SMD, MPN=SDNT2012X103F3950FTF, MSL="MSL 1", Part Number=SDNT2012X103F3950FTF, PartType=Thermistor, Pins=2, RoHS=Comply
R13: library part RES, Package=RESC0603N, BOMDescription="SMD CHIP RESISTOR RESC0603N DNI", CFootprint=RESC0603N, ClassName=Resistor, ComponentLink1Description=Datasheet, MntType=SMD, MSL="MSL 1", Part Number=RES, PartType="CHIP RESISTOR", Pins=2, RoHS=Comply
SB1: library part SKRKAEE020, BOMDescription=SKRKAEE020, CFootprint=SW_SKRKAEE020, ClassName=Button, ComponentLink1Description=Datasheet, ComponentLink1URL=https://datasheet.lcsc.com/lcsc/1809201020_ALPSALPINE-SKRKAEE020_C115357.pdf, MntType=SMD, MPN=SKRKAEE020, MSL="MSL 1", Part Number=SKRKAEE020, PartType=BUTTON, Pins=2, RoHS=Comply
VT1: Package=SOT-23, BOMDescription=AO3401A, CFootprint=SOT-23, ClassName=MosFET, ComponentLink1Description=Datasheet, ComponentLink1URL=https://datasheet.lcsc.com/lcsc/2007171935_HUASHUO-AO3401A_C700954.pdf, MntType=SMD, MPN=AO3401A, MSL="MSL 1", Part Number=AO3401A, PartType=P-MOSFET, Pins=3, RoHS=Comply
X1: library part SmartHome_for_switch, BOMDescription=PLS-3, CFootprint=SmartHome_for_switch, ClassName=Connector, MntType=DIP, MPN=PLS-3, MSL="MSL 1", Part Number=SmartHome_for_switch, PartType=CONNECTOR, Pins=3, RoHS=Comply
X2: Package=CONNPLS5, BOMDescription="DIP CONNECTOR CONNPLS5     PLS5", CFootprint=PLS5, ClassName=Connector, ComponentLink1Description=Datasheet, MntType=DIP, MPN=PLS5, MSL="MSL 1", Part Number=PLS5, PartType=CONNECTOR, Pins=5, RoHS=Comply, System=Connector, Wire1=WIRE_1, Wire2=WIRE_2, Wire3=WIRE_3, Wire4=WIRE_4, Wire5=WIRE_5
X5: library part SMA_WR_60311042114502, Manufacturer=WE, MPN=60311042114502, BOMDescription="SMD SMA  Value    60311042114502", CFootprint=60311042114502, ClassName=SMA, ComponentLink1Description=Datasheet, ComponentLink1URL=https://katalog.we-online.de/em/datasheet/60311042114502.pdf, MntType=SMD, MSL="MSL 1", Part Number=SMA_WR_60311042114502, PartType=SMA, Pins=5, RoHS=Comply
X7 X8: library part Test_PLS1, BOMDescription="DIP PLS", CFootprint=PLS1, ClassName=Test_Point, ComponentLink1Description=Datasheet, MntType=DIP, MSL="MSL 1", Part Number=Test_PLS1, PartType=PLS, Pins=1, RoHS=Comply, System=Connector
ZQ1: Manufacturer="Yangxing Tech", BOMDescription="SMD XTAL X322525MOB4SI", CFootprint=TSX-3225_V, ClassName=XTAL, ComponentLink1Description=Datasheet, ComponentLink1URL=https://datasheet.lcsc.com/szlcsc/Yangxing-Tech-X322525MOB4SI_C9006.pdf, MntType=SMD, MPN=X322525MOB4SI, MSL="MSL 1", Part Number=X322525MOB4SI, PartType=XTAL, Pins=4, RoHS=Comply
G1: BOMDescription=C70373, CFootprint=BAT-SMD_CR2032-3V, ClassName=Battery, ComponentLink1Description=Datasheet, ComponentLink1URL=https://datasheet.lcsc.com/lcsc/1810231513_Q&J-C70373_C70373.pdf, MntType=SMD, MPN=C70373, MSL="MSL 1", Part Number=C70373, PartType=Battery, Pins=2, RoHS=Comply
TP1 TP2 TP3 TP4 TP5 TP6 TP7 TP8 TP9: BOMDescription=SMD, CFootprint=TP-ROUND-TOP-1.5, ClassName=Touch, ComponentLink1Description=Datasheet, MntType=SMD, MSL="MSL 1", Part Number=TP-SINGLE-ROUND, RoHS=Comply
X3 X4: BOMDescription=DG350-3.5-02P-14-00A, CFootprint=Conn_3,5mm_2pin, ClassName=Connector, ComponentLink1Description=Datasheet, ComponentLink1URL=https://datasheet.lcsc.com/lcsc/2106062140_DEGSON-DG350-3.5-02P-14-00A-H_C2760668.pdf, MntType=DIP, MPN=DG350-3.5-02P-14-00A, MSL="MSL 1", Part Number=DG350-3.5-02P-14-00A, PartType=CONNECTOR, Pins=2, RoHS=Comply, System=Connector, Wire1=WIRE1, Wire2=WIRE2
X6: BOMDescription="DIP CONNECTOR  DG500-5.0-02P-14    DG500-5.0-02P-14", CFootprint=DG500-5.0-02P-14, ClassName=Connector, ComponentLink1Description=Datasheet, MntType=DIP, MPN=DG500-5.0-02P-14, MSL="MSL 1", Part Number=DG500-5.0-02P-14, PartType=CONNECTOR, Pins=2, RoHS=Comply, Rule="Polygon Connect Style [Style - Relief Connect    Width = 0.5mm    Angle = 90    # Entries = 4    Air Gap = 0.254mm    ]", System=Connector, Wire1=WIRE1, Wire2=WIRE2

## Free pads (board coordinates)
  round 0.5 hole 0.5 unplated: 2(0.5,9.5) 3(1.401,9.5) 3(2.815,9.5) 3(3.763,9.5) 3(4.699,9.5) 3(6.565,9.5) 3(8.432,9.5) 3(10.298,9.5) 3(11.246,9.5) 3(12.182,9.5) 3(13.13,9.5) 3(14.066,9.5) 3(15.013,9.5) 3(15.949,9.5) 3(16.897,9.5) 3(17.833,9.5) 3(18.781,9.5) 3(19.717,9.5) 3(20.664,9.5) 3(21.6,9.5) 3(22.548,9.5) 3(23.484,9.5) 3(24.432,9.5) 3(25.368,9.5) 3(26.315,9.5) 3(27.251,9.5) 3(28.199,9.5) 3(29.135,9.5) 3(30.083,9.5) 3(31.019,9.5) 3(31.966,9.5) 3(32.902,9.5) 3(33.85,9.5)

## Via types
v1: diameter 0.6, hole 0.3, Top Layer to Bottom Layer, tented both sides, 128 vias
v2: diameter 0.7, hole 0.3, Top Layer to Bottom Layer, tented both sides, 3 vias

## Nets (pads, with @x,y where several pads share a name; then routed paths per layer and width w, separated by ;. In a path a pad name is that pad's centre, name@x,y a point inside that pad or via, vN(x,y) a via of type N, cw(c..) or ccw(c..) an arc to the next point about the centre after c; other vN are vias at no path point)
3V3: C1.2 C2.2 C3.1 C5.2 C6.2 C8.2 C9.2 C10.2 C11.1 C14.1 C23.1 C24.2 C25.2 DD1.5 DD2.39 DD2.45 DD3.4 DD4.7 DD4.8 L3.2 L7.2 R1.1 R2.1 R3.2 R4.2 R6.2 R7.2 R13.2 R15.2 X2.1 X3.1 | length 33.6
  Top Layer w0.2: v1(2.834,13.394) 2.834,14.217 C2.2 ; C2.2@2.92,14.302 2.957,14.339 3.382,14.339 5.275,16.232 DD2.39 ; DD2.45 8.275,15.125 8.35,15.05 C3.1@8.35,14.295 ; v1(8.35,12.158) C3.1@8.35,13.95 ; v1(8.8,36.6) 8.8,37.575 C11.1 8.875,37.7 C10.2 C8.2 C9.2 DD4.8 DD4.7 ; R4.2 v1(13.13,17.288) C1.2 13.178,16.65 DD1.5 ; v1(14.6,37.95) C14.1 L3.2 ; R3.2 15.8,21.784 v1(15.8,22.6) ; DD3.4 C6.2@17.895,11.7 ; C6.2 v1(18.875,11.705) ; C23.1 28.9,25.95 R15.2
  Top Layer w0.3: R7.2 5.02,33.599 v1(5.896,33.599) ; R6.2 v1(5.952,36.247) ; R15.2 28.97,25.981 29.921,25.981 v1(29.941,25.961)
  Top Layer w0.5: C25.2 C24.2 21.613,19.938 23.563,19.938 L7.2 ; R13.2 30.307,14.515 30.307,13.913 v1(30.313,13.907)
  other v1: 17.75,17.6 19.6,17.6 21.6,17.6 19.6,18.525 21.6,18.525 17.75,18.7 17.75,19.725
+12V: C21.2 DD5.3 R11.1 R13.1 VT1.2 | length 20.7
  Top Layer w0.2: C21.2 27.331,20.087 27.134,20.284 C21.2@27.563,20.284 ; R11.1 30.28,28.525 30.455,28.349 v1(30.564,28.349) ; VT1.2@28.9,20.215 v1(28.9,21.148)
  Top Layer w0.4: DD5.3 26.363,22.137 26.363,21.214 26.726,20.851 26.726,20.462 26.745,20.443 27.563,20.443 27.731,20.275 27.731,20.26 27.776,20.215 29.01,20.215 29.01,18.79 30.3,17.5 R13.1
  Bottom Layer w0.2: v1(28.9,21.148) 30.564,22.812 v1(30.564,28.349)
+12V_ext: G1.1 R9.1 VT1.3 X6.1 | length 42.1
  Top Layer w0.3: R9.1 30.775,23.604 31.013,23.367 VT1.3
  Top Layer w0.5: v1(14.766,29.8) 14.793,29.8 15.031,30.038 v1(31.542,30.038) ; VT1.3@31.429,21.148 35.857,21.148 35.979,21.27 36.675,21.27 X6.1
  Bottom Layer w0.5: G1.1@10.752,29.8 v1(14.766,29.8) ; v1(31.542,30.038) 34.313,30.038 34.607,29.745 34.607,25.17 37,22.777 X6.1
ADC_Temp_5: C7.2 DD2.48 R8.2 | length 7.1
  Top Layer w0.2: DD2.48 9.775,17.567 9.825,17.517 10.108,17.517 11.6,16.025 C7.2 11.55,12.85 R8.2
ADC_Thermistor_5: DD2.47 R2.2 R5.1 | length 3.9
  Top Layer w0.2: DD2.47 9.275,16.287 R2.2 9.325,14.875 9.85,14.35 R5.1
ALERT_SHT_5: DD1.3 DD2.12 | length 7.9
  Top Layer w0.2: DD2.12 11.371,24.854 12.307,24.854 v1(12.353,24.808) ; v1(14.766,19.672) 14.771,19.668 DD1.3
  Bottom Layer w0.2: v1(12.353,24.808) 12.394,24.768 12.394,22.008 14.729,19.672 v1(14.766,19.672)
BTN_1_5: DD2.36 SB1.2 | length 14.9
  Top Layer w0.2: SB1.2 2.108,6.233 2.108,10.015 4.274,12.181 v1@4.274,14.217 ; v1(2.725,18.893) DD2.36
  Bottom Layer w0.2: v1(2.725,18.893) 2.725,15.765 v1(4.273,14.217)
GND: C1.1 C2.1 C3.2 C4.1 C5.1 C6.1 C7.1 C8.1 C9.1 C10.1 C11.2 C12.2 C14.2 C16.2 C17.2 C18.2 C20.2 C21.1 C24.1 C25.1 D1.1 DD1.2 DD1.7 DD1.8 DD1.9 DD2.37 DD2.46 DD3.2 DD3.5 DD4.1 DD4.6 DD4.9 DD4.21 DD5.1 G1.2 R5.2 R10.2 R12.2 R14.2 SB1.1 X2.5 X3.2 X5.2 X5.3 X5.4 X5.5 X6.2 X7.1 X8.1 ZQ1.2 ZQ1.4 | length 7.1
  Top Layer w0.2: v1(6.491,14.786) 6.554,14.85 7.097,14.85 C5.1 ; DD1.2 15.271,18.075 DD1.9 15.271,17.575 DD1.7 DD1.8 ; v1(23.746,28.525) R12.2
  Top Layer w0.3: v1(11.6,35.12) 11.68,35.12 11.85,34.95 DD4.9
  other v1: 8.68,5.116 4.214,6.116 28.3,6.307 19.171,7.15 0.863,8 5.02,8.216 22.625,8.55 25.835,11.677 23.59,11.9 6.701,12.158 1.027,12.675 0.602,14.18 12.85,14.282 17.895,14.409 26.85,16.777 28.363,16.777 3.632,16.967 2.125,17.758 7.561,20.15 27.66,21.62 9.775,22.094 6.957,22.28 5.125,22.85 23.319,23.686 27.731,23.805 4.375,24.652 9.425,24.798 6.908,24.9 23.08,25.25 18.875,25.552 33.583,25.8 29.941,26.975 32.25,27 15.8,27.857 15.5,31.01 16.63,31.295 10.176,31.8 19.954,32.45 18.7,32.52 14.1,32.559 15.133,32.566 30.25,33.443 21.027,33.577 27.283,33.67 24.1,33.898 11.6,34.17 12.55,34.17 22.644,34.8 21.027,34.9 25.763,34.885 28.7,34.885 31.55,34.925 12.55,35.12 7.425,35.95 31.4,36.6 14.203,36.88 16.85,36.92 18.73,36.92 29.3,37.047 21.95,37.146 23.3,37.147 24.923,37.146 26.25,37.147 27.66,37.146 5.947,37.665 29.941,37.665 17.75,37.949 20.773,38.2 9.05,38.827 12.35,38.827 28.3,38.827 29.941,38.827 13.777,39 16.327,39
  other v2: 10.007,11.727 14.7,14.396 15.416,17.85
GPIO_0: DD2.5 DD4.10 | length 24
  Top Layer w0.2: v1(10.5,36.7) 10.608,36.7 10.803,36.505 11.3,36.505 11.35,36.455 DD4.10 ; DD2.5 12.872,21.4 12.972,21.3 14.153,21.3 v1(14.203,21.35)
  Bottom Layer w0.2: v1(10.5,36.7) 10.5,35.848 8.564,33.912 8.564,27.651 9.903,26.312 12.263,26.312 14.203,24.373 v1(14.203,21.35)
GPIO_1: DD2.6 DD4.11 | length 20.7
  Top Layer w0.2: v1(9.464,35.719) 9.569,35.719 9.8,35.95 DD4.11 ; DD2.6 12.356,21.9 13.317,22.861 13.317,23.235 v1(13.394,23.311)
  Bottom Layer w0.2: v1(9.464,35.719) 8.143,34.398 8.143,27.332 9.606,25.869 12.141,25.869 13.394,24.616 v1(13.394,23.311)
NetC4_2: C4.2 DD2.38 | length 3.5
  Top Layer w0.2: C4.2@2.901,15.741 3.866,15.741 4.775,16.65 DD2.38
NetC12_1: C12.1 DD4.3 L1.2 L4.1 | length 5.5
  Top Layer w0.291: DD4.3 14.4,34.45 15.021,33.83 15.321,33.83 L1.2 16.63,33.65 C12.1 18.73,33.67 L4.1
NetC13_1: C13.1 C15.1 C16.1 L4.2 L5.1 | length 4.4
  Top Layer w0.291: L4.2 19.8,33.7 C13.1 C15.1 19.82,35.92 C16.1 L5.1
NetC13_2: C13.2 DD4.4 L1.1 | length 5.3
  Top Layer w0.291: DD4.4 14.7,34.95 14.859,34.791 15.459,34.791 L1.1 18.75,34.75 C13.2
NetC15_2: C15.2 L2.2 | length 1
  Top Layer w0.291: L2.2 C15.2
NetC17_1: C17.1 L5.2 L6.1 | length 2.1
  Top Layer w0.291: L5.2 25.13,35.92 L6.1
NetC18_1: C18.1 C19.1 L6.2 | length 2
  Top Layer w0.291: L6.2 C19.1
NetC19_2: C19.2 C20.1 X5.1 | length 5.1
  Top Layer w0.291: C19.2 C20.1 30.247,35.853 X5.1@34.388,35.853
NetC22_1: C22.1 DD5.2 L7.1 | length 13.8
  Top Layer w0.4: C22.1 21.96,26.492 21.96,23.536 v1(23.417,22.079) ; v1(25.325,18.15) L7.1 25.363,19.988 25.363,22.113 DD5.2
  Bottom Layer w0.4: v1(23.417,22.079) 23.417,20.058 v1(25.325,18.15)
NetC22_2: C22.2 DD5.6 | length 2.5
  Top Layer w0.3: C22.2 24.05,26.5 24.45,26.1 DD5.6
NetC23_2: C23.2 DD5.4 R14.1 R15.1 | length 3.6
  Top Layer w0.3: DD5.4 27.1,24.85 27.2,24.95 27.75,24.95 C23.2 27.875,25.125 27.875,26.975 R14.1
NetD1_2: D1.2 R1.2 | length 2
  Top Layer w0.3: R1.2 D1.2
NetDD2_1: DD2.1 TP3.1 | length 1.4
  Top Layer w0.2: v1(11.074,18.15) 11.074,18.258 11.325,18.509 DD2.1
NetDD2_2: DD2.2 TP5.1 | length 1.6
  Top Layer w0.2: v1(9.825,20.109) 10.035,19.9 DD2.2
NetDD2_24: DD2.24 X2.4 | length 5.9
  Top Layer w0.2: X2.4@1.913,31.356 4.275,28.994 DD2.24
NetDD2_25: DD2.25 R6.1 X2.2 | length 13.8
  Top Layer w0.2: X2.2@1.993,36.177 3.876,36.177 R6.1 3.958,36.234 v1(3.958,35.275) ; DD2.25 2.725,25.636 v1(2.74,25.651)
  Bottom Layer w0.2: v1(2.74,25.651) 2.74,27.059 3.958,28.277 v1(3.958,35.275)
NetDD2_26: DD2.26 R7.1 X2.3 | length 13.5
  Top Layer w0.2: X2.3@1.913,33.896 0.613,32.596 0.613,25.437 1.65,24.4 DD2.26 ; X2.3 R7.1@3.885,33.634
NetDD2_27: DD2.27 TP9.1 | length 2.7
  Top Layer w0.2: v1(1.395,23.602) 1.693,23.9 DD2.27
  Bottom Layer w0.2: v1(1.395,23.602) 1.46,23.667 1.46,24.743 TP9.1
NetDD2_28: DD2.28 TP8.1 | length 3.3
  Top Layer w0.2: DD2.28 3.81,23.4 v1(3.854,23.444)
  Bottom Layer w0.2: v1(3.854,23.444) 3.962,23.444 4.622,24.105 TP8.1
NetDD2_33: DD2.33 TP7.1 | length 3.2
  Top Layer w0.2: DD2.33 2.775,20.95 3.522,20.95 v1(4.076,21.504)
  Bottom Layer w0.2: TP7.1 2.887,22.254 3.561,21.581 3.999,21.581 v1(4.076,21.504)
NetDD2_34: DD2.34 TP6.1 | length 2.1
  Top Layer w0.2: DD2.34 2.736,20.411 4.815,20.411 v1(4.826,20.422)
NetDD2_35: DD2.35 TP4.1 | length 2.9
  Top Layer w0.2: DD2.35 3.615,19.9 v1(4.296,19.219)
  Bottom Layer w0.2: v1(4.296,19.219) 4.335,19.179 4.335,18.257 TP4.1
NetDD2_43: DD2.43 TP1.1 | length 2.3
  Top Layer w0.2: v1(7.075,18.96) 7.275,18.76 DD2.43
  Bottom Layer w0.2: TP1.1 6.399,18.217 7.075,18.893 v1(7.075,18.96)
NetDD2_44: DD2.44 TP2.1 | length 2.8
  Top Layer w0.2: DD2.44 7.775,18.935 v1(8.059,19.219)
  Bottom Layer w0.2: v1(8.059,19.219) 8.135,19.143 8.135,18.93 8.564,18.502 TP2.1
NetDD3_3: DD3.3 R8.1 | length 2
  Top Layer w0.2: R8.1@12.7,11.646 R8.1 12.654,11.7 DD3.3
NetDD4_5: DD4.5 L2.1 L3.1 | length 3.2
  Top Layer w0.291: DD4.5 14.4,35.45 14.85,35.9 L3.1 L2.1
NetDD4_17: DD4.17 ZQ1.1 | length 4.8
  Top Layer w0.2: ZQ1.1 10.125,29 11.1,29.975 11.1,31.6 11.35,31.85 DD4.17
NetDD4_18: DD4.18 ZQ1.3 | length 2.7
  Top Layer w0.2: DD4.18 11.85,30.95 ZQ1.3
NetDD5_5: DD5.5 R11.2 R12.1 | length 5.4
  Top Layer w0.3: DD5.5@25.375,24.875 DD5.5 25.4,26.5 26.35,27.45 R12.1 R11.2
NetR9_2: R9.2 R10.1 VT1.1 | length 5
  Top Layer w0.3: VT1.1 29.05,22.191 R9.2 29.085,23.639 29.085,24.095 29.348,24.358 30.179,24.358 30.946,25.125 30.946,25.868 R10.1
nRES_SHT_5: DD1.6 DD2.11 | length 12.6
  Top Layer w0.2: v1(10.154,24.358) 10.196,24.4 DD2.11 ; v1(14.715,15.771) 14.771,15.826 DD1.6
  Bottom Layer w0.2: v1(10.154,24.358) 10.154,22.564 14.715,18.002 v1(14.715,15.771)
RF_CLK: DD2.7 DD4.20 | length 13
  Top Layer w0.2: DD2.7 12.291,22.4 12.794,22.903 12.794,23.604 14.1,24.91 14.1,31.1 12.85,32.35 DD4.20
RF_RXTX: DD2.8 DD4.19 | length 12.3
  Top Layer w0.2: DD2.8 12.225,22.9 12.381,23.056 12.381,23.756 13.63,25.006 13.63,31.004 12.35,32.284 DD4.19
SCL_5: DD1.4 DD2.3 R4.1 | length 3.9
  Top Layer w0.2: DD2.3 12.513,20.4 13.13,19.783 R4.1 13.205,19 DD1.4
SDA_5: DD1.1 DD2.4 R3.1 | length 6.2
  Top Layer w0.2: DD2.4 13.585,20.9 13.735,20.75 15.675,20.75 R3.1 DD1.1
SPI_CS: DD2.19 DD4.16 | length 8.9
  Top Layer w0.2: DD2.19 6.775,30.181 10.007,33.413 10.513,33.413 DD4.16
SPI_MISO: DD2.21 DD4.14 | length 10.9
  Top Layer w0.2: DD2.21 5.775,30.595 6.13,30.95 v1(6.13,31.6) ; v1(7.543,33.02) 8.974,34.45 DD4.14
  Bottom Layer w0.2: v1(6.13,31.6) 6.13,31.603 7.543,33.016 v1(7.543,33.02)
SPI_MOSI: DD2.22 DD4.15 | length 11.1
  Top Layer w0.2: v1(5.25,30.95) 5.25,30.85 5.263,30.838 5.263,26.463 DD2.22 ; v1(7.543,32.112) 7.561,32.112 9.399,33.95 DD4.15
  Bottom Layer w0.2: v1(5.25,30.95) 6.399,30.95 7.543,32.094 v1(7.543,32.112)
SPI_SCK: DD2.20 DD4.13 | length 11.4
  Top Layer w0.2: DD2.20 6.275,30.281 6.943,30.949 6.943,33.268 8.625,34.95 DD4.13
Switch_btn_1_5: DD2.40 X1.1 | length 20.1
  Top Layer w0.2: DD2.40 5.775,16.074 5.263,15.563 5.263,15.538 5.025,15.3 5.025,11.314 5.539,10.8 5.539,9.236 9.28,5.495 9.28,3.372 10.111,2.54 X1.1
Switch_btn_2_5: DD2.41 X1.2 | length 25.2
  Top Layer w0.2: DD2.41 6.275,15.984 6.274,15.983 6.249,15.983 5.663,15.397 5.663,15.373 5.425,15.134 5.425,11.879 7.425,9.879 7.425,9.1 12.025,4.5 18.04,4.5 X1.2
Switch_btn_3_5: DD2.42 X1.3 | length 32.4
  Top Layer w0.2: DD2.42 6.775,15.919 6.439,15.583 6.415,15.583 6.063,15.231 6.063,15.207 5.825,14.969 5.825,12.086 7.111,10.8 8.297,10.8 9.392,9.704 9.392,9.096 12.588,5.9 20.072,5.9 22.249,3.723 22.249,3.372 23.08,2.54 X1.3
UART_RXD_5: DD2.32 X4.1 | length 46.6
  Top Layer w0.2: v1(0.808,21.345) 0.863,21.4 DD2.32
  Bottom Layer w0.2: v1(0.808,21.345) 0.808,16.268 6.455,10.621 32.366,10.621 35.053,13.307 X4.1@36.893,13.307
UART_TXD_5: DD2.31 X4.2 | length 46.1
  Top Layer w0.2: v1(0.997,22.161) 1.258,21.9 DD2.31
  Bottom Layer w0.2: v1(0.997,22.161) 0.997,22.149 1.525,21.621 1.525,16.117 4.335,13.307 32.902,13.307 36.402,16.807 X4.2@36.893,16.807
pads on no net: DD2.9 DD2.10 DD2.13 DD2.14 DD2.15 DD2.16 DD2.17 DD2.18 DD2.23 DD2.29 DD2.30 DD3.1 DD4.2 DD4.12

## Polygon pours and split planes (outlines as drawn)
GND on Top Layer "M1, Board-No Net" (solid, remove dead copper, pour order 2): 0,40.8 44.9,40.8 44.9,5.9 43.1,4.1 0,4.1
3V3 on Top Layer "M1, Board-No Net" (solid, pour order 1): 22.3,20.4 17.18,20.4 16.327,19.547 16.327,16.673 17.2,15.8 22.3,15.8
GND on GND "M1, Board-No Net" (solid, pour order 3): 0,40.8 40,40.8 40,1 39,0 0,0
GND on Bottom Layer "M1, Board-No Net" (solid, pour order 4): -5,40.8 44.9,40.8 44.9,5.9 43.1,4.1 -4.2,4.1 -5,4.9
3V3 on Power "M1, Board-No Net" (solid, pour order 6): 43.26,5.08 40.72,2.54 1.16,2.54 -5,8.7 -5,40.7 30.562,40.7 30.558,31.366 33.567,28.678 40.72,28.533 43.26,25.501

## Silkscreen, mask and mechanical layers (free items; w line width, h text height)
Top Overlay:
  text "3V3" at 3.685,37.874 h0.8
  text "DATA" at 3.606,34.44 h0.8
  text "CLK" at 4.118,31.961 h0.8
  text "GND" at 34.834,30.899 h0.8
  text "RST" at 4.118,30.547 h0.8
  text "5..12V" at 33.217,29.74 h0.8
  text "GND" at 4.118,28.26 h0.8
  text "TXD" at 30.101,12.232 h0.8
  text "RXD" at 30.243,10.865 h0.8
  text "GND" at 30.243,7.737 h0.8
  text "3V3" at 30.243,6.167 h0.8
Board:
  the board outline again, w0.5

## Dimensions
0.5,9.5 to 0,40 on Mechanical 3
0,0 to 0,40 on Mechanical 3
0,0 to 38.8,0 on Mechanical 3